# Altium PCB NC1-3A-BASIS.PcbDoc
Units mm, origin at the board's own origin, x right, y up, seen from the top; angles counter-clockwise.
Board outline 45 x 16 mm, 2 copper layers (Top Layer, Bottom Layer), stack 1.57 mm thick; 26 components, 18 nets, 68 pads, 38 vias.
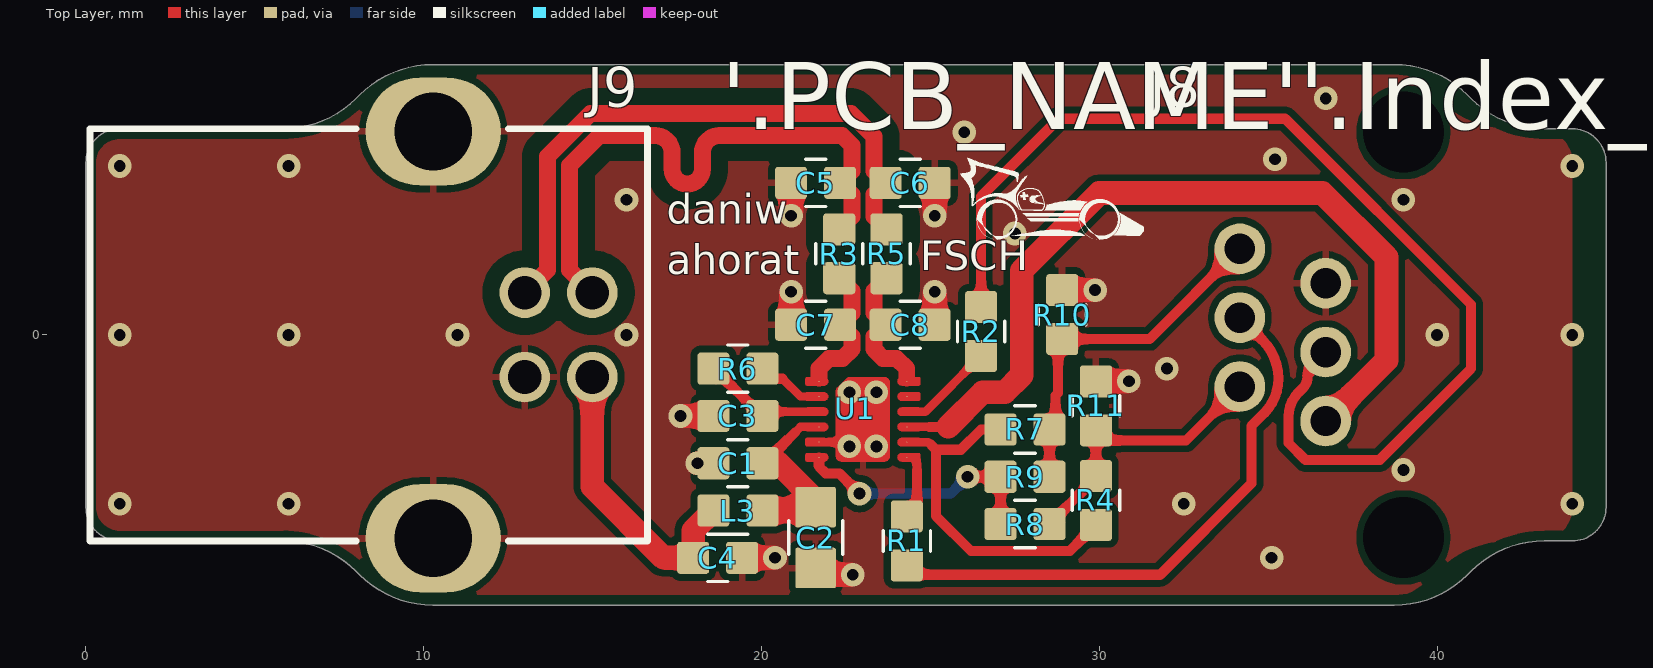
[diagram p0: Top Layer view]
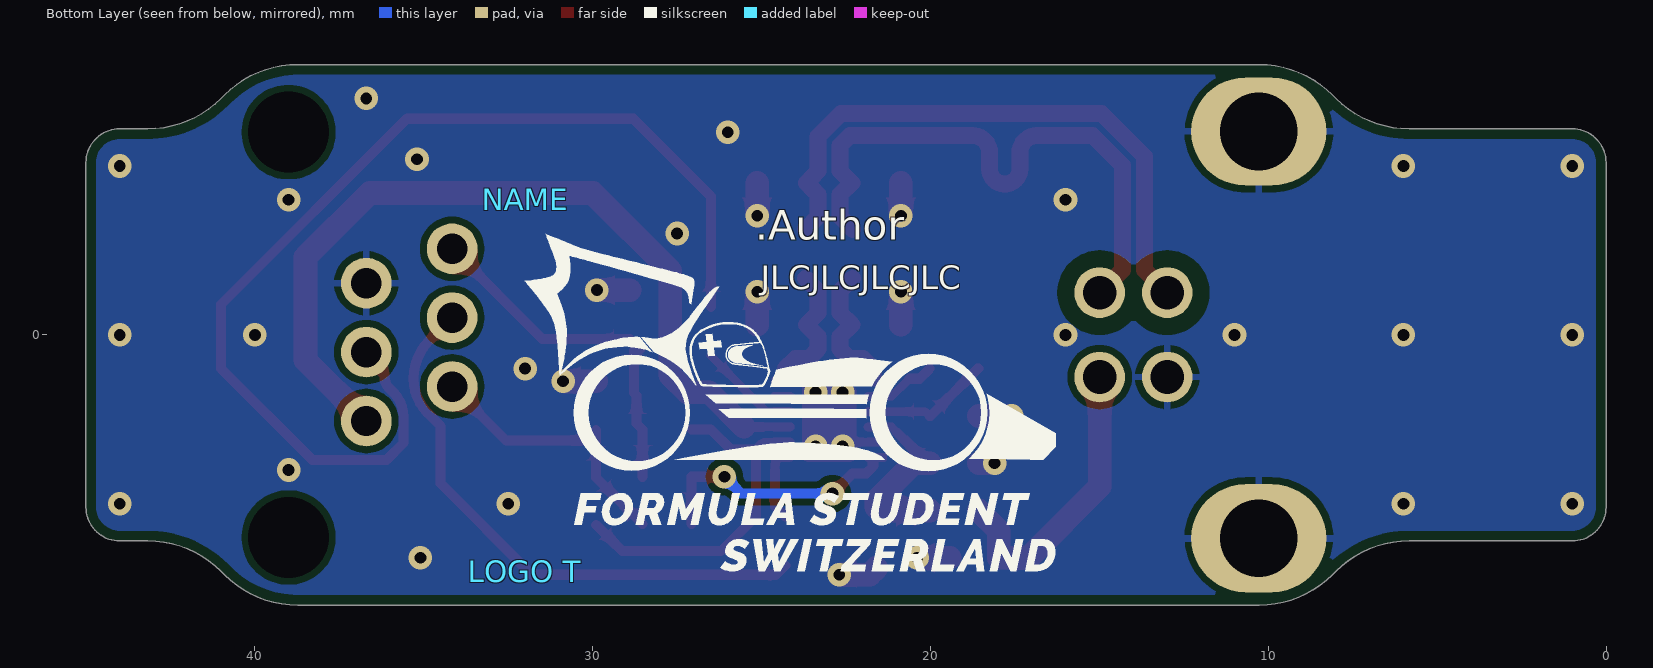
[diagram p1: Bottom Layer view, seen from below]

## Layer stack, top to bottom
Top Solder: solder mask 0.0102, Solder Resist, Dk 3.5
Top Layer: signal copper 0.035
Dielectric 1: dielectric 1.5, FR-4, Dk 4.8
Bottom Layer: signal copper 0.035
Bottom Solder: solder mask 0.0102, Solder Resist, Dk 3.5

## Board outline
1,-6.1 5.83,-6.1 cw(c5.83,-9.166) 7.998,-6.998 8.102,-7.102 ccw(c10.27,-4.934) 10.27,-8 38.73,-8 ccw(c38.73,-4.934) 40.898,-7.102 41.002,-6.998 cw(c43.17,-9.166) 43.17,-6.1 44,-6.1 ccw(c44,-5.1) 45,-5.1 45,5.1 ccw(c44,5.1) 44,6.1 43.17,6.1 cw(c43.17,9.166) 41.002,6.998 40.898,7.102 ccw(c38.73,4.934) 38.73,8 10.27,8 ccw(c10.27,4.934) 8.102,7.102 7.998,6.998 cw(c5.83,9.166) 5.83,6.1 1,6.1 ccw(c1,5.1) 0,5.1 0,-5.1 ccw(c1,-5.1)

## Design rules (kind name [scope] priority, off if disabled: settings)
BoardOutlineClearance [not (InComponent('MOUSE*'))] p1: gap=0.3 ignorepadtopadclearanceinfootprint=FALSE except(0: Arc-SplitContinuation Track-SplitContinuation SMDPad-SplitContinuation THPad-SplitContinuation Via-SplitContinuation Fill-SplitContinuation Poly-SplitContinuation Region-SplitContinuation Text-SplitContinuation)
Clearance Clearance_USB [InDifferentialPairClass('USB') vs not InDifferentialPairClass('USB')] p1: gap=0.5 ignorepadtopadclearanceinfootprint=FALSE except(0.15: Arc-Arc Arc-Track Arc-SMDPad Track-Track Track-SMDPad SMDPad-SMDPad; 0.2: Arc-THPad Arc-Via Arc-Text Arc-Hole Track-THPad Track-Via Track-Text Track-Hole SMDPad-THPad SMDPad-Via SMDPad-Text SMDPad-Hole THPad-THPad THPad-Via THPad-Text THPad-Hole Via-Via Via-Text Via-Hole Text-Text Text-Hole)
Clearance [All] p2: gap=0.2 ignorepadtopadclearanceinfootprint=FALSE except(0: Arc-Hole Track-Hole SMDPad-Hole THPad-Hole Via-Hole Fill-Hole Poly-Hole Region-Hole Text-Hole; 0.15: Arc-Arc Arc-Track Arc-SMDPad Arc-THPad Arc-Via Arc-Text Track-Track Track-SMDPad Track-THPad Track-Via Track-Text SMDPad-SMDPad SMDPad-THPad SMDPad-Via SMDPad-Text THPad-THPad THPad-Via THPad-Text Via-Via Via-Text Text-Text)
ComponentClearance ComponentClearance_ESP-01S [All] p1: gap=0.254 collisioncheckmode=3 verticalgap=0.254 showdistances=FALSE
ComponentClearance ComponentClearance_Enclosure [isfree] p2: gap=0 collisioncheckmode=3 verticalgap=0 showdistances=FALSE
ComponentClearance [All] p3: gap=0.25 collisioncheckmode=3 verticalgap=0.25 showdistances=FALSE
DiffPairsRouting [InDifferentialPair('D') or InDifferentialPair('USB_D')] p1: maxlimit=0.15 minlimit=0.15 mostfreqgap=0.15 toplayer_minwidth=0.5 toplayer_maxwidth=0.5 toplayer_prefwidth=0.5 bottomlayer_minwidth=0.5 bottomlayer_maxwidth=0.5 bottomlayer_prefwidth=0.5 impedanceprofiledriven=TRUE impedanceprofileid={0B2F72EE-70D5-4F8D-B648-94B946845256} impedanceprofilevalue=90.000000 maxuncoupledlength=12.7
Height [All] p1: minheight=0 maxheight=100 prefheight=12.7
HoleSize [All] p1: absolutevalues=TRUE maxlimit=27 minlimit=0.3 maxpercent=80.000 minpercent=20.000
HoleToHoleClearance [All] p1: gap=0.3 allowstackedmicrovias=TRUE
MatchedLengths "Schematic Matched Net Lengths_1" [InDifferentialPairClass('USB')] p1: tolerance=0.2 checknetsindiffpair=TRUE checkdiffpairvsdiffpair=FALSE checkxsignals=FALSE checkothers=FALSE
MinimumSolderMaskSliver [All] p1: minsoldermaskwidth=0.095
PolygonConnect [All] p1: thpad.connectstyle=Relief thpad.reliefconductorwidth=0.2 thpad.reliefentries=4 thpad.polygonreliefangle="90 Angle" thpad.airgapwidth=0.2 smdpad.connectstyle=Relief smdpad.reliefconductorwidth=0.2 smdpad.reliefentries=4 smdpad.polygonreliefangle="90 Angle" smdpad.airgapwidth=0.2 via.connectstyle=Direct via.reliefconductorwidth=0.254 via.reliefentries=4 via.polygonreliefangle="90 Angle" via.airgapwidth=0.254
RoutingVias [All] p1: holewidth=0.35 width=0.7 viastyle="Through Hole" minholewidth=0.35 minwidth=0.7 maxholewidth=5 maxwidth=6
SilkToSilkClearance [All] p1: silktosilkclearance=0.1
SilkToSolderMaskClearance [IsPad] p1: minsilkscreentomaskgap=0.1 clearancetoexposedcopper=TRUE
SolderMaskExpansion "SolderMaskExpansion Via" [IsVia] p1: expansion=0.1 istentingtop=TRUE
SolderMaskExpansion [All] p2: expansion=0.05 istentingtop=FALSE
UnRoutedNet [All] p1: checkbadconnections=TRUE
Width [All] p1: maxlimit=5 minlimit=0.15 preferedwidth=0.3 minimp=50.000000 maximp=50.000000 favimp=50.000000
21 further rules are at their usual default settings.

## Classes and differential pairs
differential pair class USB: D USB_D
component class NC1-3-Top: C1 C2 C3 C4 C5 C6 C7 C8 J8 J9 L3 R1 R2 R3 R4 R5 R6 R7 R8 R9 U1
differential pair USB_D: +USB_D_P -USB_D_N
differential pair D: +D_P -D_N

## Components (designator, comment, footprint, x,y, rotation, side; value= is the part's Value field where it differs from the comment)
C1 "100N/0603/50V/X7R" CAP0603_X7R 19.3,-3.8 r180 top value=100nF
C2 "4.7U/0805/16V/X7R" CAP0805_X7R 21.6,-6 r270 top value=4.7uF
C3 "100N/0603/50V/X7R" CAP0603_X7R 19.3,-2.4 r180 top value=100nF
C4 "10N/0603/50V/X7R" CAP0603_X7R 18.7,-6.6 r0 top value=10nF
C5 "10P/0603/50V/C0G" CAP0603_C0G 21.6,4.5 r180 top value=10pF
C6 "10P/0603/50V/C0G" CAP0603_C0G 24.4,4.5 r0 top value=10pF
C7 "10P/0603/50V/C0G" CAP0603_C0G 21.6,0.3 r180 top value=10pF
C8 "10P/0603/50V/C0G" CAP0603_C0G 24.4,0.3 r0 top value=10pF
J8 "RJ12" RJ12-PULSE-E5566-Q0LK22-L 45,0 r90 top
J9 "USB-B-CUI" USB-B_CUI_UJ2-BH-TH 0,0 r270 top
L3 "30R/0603/FERRITE" FB0603 19.3,-5.2 r0 top value=30R
"LOGO T" "Comment" FSCH-LOGO-10MM 32,-7 r180 bottom
NAME "Comment" PCB-NAME 32,4 r180 bottom
R1 "0R/0603" R0603-0.40-WW 24.3,-6.1 r270 top value=0R
R2 "0R/0603" R0603-0.40-WW 26.5,0.1 r90 top value=0R
R3 "27R/0603" R0603-0.40-WW 22.3,2.4 r270 top value=27R
R4 "0R/0603" R0603-0.40-WW 29.9,-4.9 r90 top value=0R
R5 "27R/0603" R0603-0.40-WW 23.7,2.4 r270 top value=27R
R6 "0R/0603" R0603-0.40-WW 19.3,-1 r0 top value=0R
R7 "0R/0603" R0603-0.40-WW 27.8,-2.8 r0 top value=0R
R8 "0R/0603" R0603-0.40-WW 27.8,-5.6 r0 top value=0R
R9 "0R/0603" R0603-0.40-WW 27.8,-4.2 r0 top value=0R
R10 "0R/0603" R0603-0.40-WW 28.9,0.6 r270 top value=0R
R11 "0R/0603" R0603-0.40-WW 29.9,-2.1 r270 top value=0R
U1 "FT234XD" DFN045P300X300X080-12-EP160X250 23,-2.5 r0 top
? "Comment" JLC-ORDER 21,3 r180 bottom

## Footprints (in the part's own frame and the unit in brackets; to place one, negate y for a bottom-side part, rotate by r counter-clockwise, add the part's x,y. Pads: shape width x height; smd on the part's side, far side on the other; paste and mask are expansions set on the pad)
CAP0603_C0G [mm]
  rrect20% 0.95x0.95 smd: 1(-0.725,0) 2(0.725,0)
  silkscreen extent -0.3,-0.7 0.3,0.7, body extent -0.8,-0.41 0.8,0.41, height 0.57
CAP0603_X7R [mm]
  rrect20% 0.95x0.95 smd: 1(-0.725,0) 2(0.725,0)
  silkscreen extent -0.3,-0.7 0.3,0.7, body extent -0.8,-0.41 0.8,0.41, height 0.57
CAP0805_X7R [mm] "Chip Capacitor 0805mil / 2012mm"
  rrect10% 1.2x1.2 smd: 1(-0.9,0) 2(0.9,0)
  silkscreen extent -0.5,-0.8 0.5,0.8, body extent -1,-0.51 1,0.51, height 0.72
DFN045P300X300X080-12-EP160X250 [mm]
  round 0.4 on Top Overlay: 1(-1.75,1.75)
  round 0.025 smd: 1(-1.3,1.125) 2(-1.3,0.675) 3(-1.3,0.225) 4(-1.3,-0.225) 5(-1.3,-0.675) 6(-1.3,-1.125) 7(1.3,-1.125) 8(1.3,-0.675) 9(1.3,-0.225) 10(1.3,0.225) 11(1.3,0.675) 12(1.3,1.125) EP(0,0)
  Top Layer region: 1.7,-1.05 1.7,-1.199 1.696,-1.218 1.685,-1.235 1.668,-1.246 1.649,-1.25 1.649,-1.25 1.15,-1.25 1.102,-1.24 1.061,-1.213 1.034,-1.172 1.024,-1.124 1.024,-1.124 1.034,-1.076 1.061,-1.035 1.102,-1.008 1.15,-0.999 1.15,-0.999 1.649,-0.999 1.668,-1.003 1.685,-1.014 1.696,-1.03 1.7,-1.05
  Top Layer region: 1.7,-0.6 1.7,-0.749 1.696,-0.768 1.685,-0.785 1.668,-0.796 1.649,-0.8 1.649,-0.8 1.15,-0.8 1.102,-0.79 1.061,-0.763 1.034,-0.722 1.024,-0.674 1.024,-0.674 1.034,-0.626 1.061,-0.585 1.102,-0.558 1.15,-0.549 1.15,-0.549 1.649,-0.549 1.668,-0.553 1.685,-0.564 1.696,-0.58 1.7,-0.6
  Top Layer region: 1.7,-0.15 1.7,-0.299 1.696,-0.318 1.685,-0.335 1.668,-0.346 1.649,-0.35 1.649,-0.35 1.15,-0.35 1.102,-0.34 1.061,-0.313 1.034,-0.272 1.024,-0.224 1.024,-0.224 1.034,-0.176 1.061,-0.135 1.102,-0.108 1.15,-0.099 1.15,-0.099 1.649,-0.099 1.668,-0.103 1.685,-0.114 1.696,-0.13 1.7,-0.15
  Top Layer region: 1.7,0.3 1.7,0.151 1.696,0.132 1.685,0.115 1.668,0.104 1.649,0.1 1.649,0.1 1.15,0.1 1.102,0.11 1.061,0.137 1.034,0.178 1.024,0.226 1.024,0.226 1.034,0.274 1.061,0.315 1.102,0.342 1.15,0.351 1.15,0.351 1.649,0.351 1.668,0.347 1.685,0.336 1.696,0.32 1.7,0.3
  Top Layer region: 1.7,0.75 1.7,0.601 1.696,0.582 1.685,0.565 1.668,0.554 1.649,0.55 1.649,0.55 1.15,0.55 1.102,0.56 1.061,0.587 1.034,0.628 1.024,0.676 1.024,0.676 1.034,0.724 1.061,0.765 1.102,0.792 1.15,0.801 1.15,0.801 1.649,0.801 1.668,0.797 1.685,0.786 1.696,0.77 1.7,0.75
  Top Layer region: 1.7,1.2 1.7,1.051 1.696,1.032 1.685,1.015 1.668,1.004 1.649,1 1.649,1 1.15,1 1.102,1.01 1.061,1.037 1.034,1.078 1.024,1.126 1.024,1.126 1.034,1.174 1.061,1.215 1.102,1.242 1.15,1.251 1.15,1.251 1.649,1.251 1.668,1.247 1.685,1.236 1.696,1.22 1.7,1.2
  Top Layer region: -1.7,-1.2 -1.7,-1.051 -1.696,-1.032 -1.685,-1.015 -1.668,-1.004 -1.649,-1 -1.649,-1 -1.15,-1 -1.102,-1.01 -1.061,-1.037 -1.034,-1.078 -1.024,-1.126 -1.024,-1.126 -1.034,-1.174 -1.061,-1.215 -1.102,-1.242 -1.15,-1.251 -1.15,-1.251 -1.649,-1.251 -1.668,-1.247 -1.685,-1.236 -1.696,-1.22 -1.7,-1.2
  Top Layer region: -1.7,-0.75 -1.7,-0.601 -1.696,-0.582 -1.685,-0.565 -1.668,-0.554 -1.649,-0.55 -1.649,-0.55 -1.15,-0.55 -1.102,-0.56 -1.061,-0.587 -1.034,-0.628 -1.024,-0.676 -1.024,-0.676 -1.034,-0.724 -1.061,-0.765 -1.102,-0.792 -1.15,-0.801 -1.15,-0.801 -1.649,-0.801 -1.668,-0.797 -1.685,-0.786 -1.696,-0.77 -1.7,-0.75
  Top Layer region: -1.7,-0.3 -1.7,-0.151 -1.696,-0.132 -1.685,-0.115 -1.668,-0.104 -1.649,-0.1 -1.649,-0.1 -1.15,-0.1 -1.102,-0.11 -1.061,-0.137 -1.034,-0.178 -1.024,-0.226 -1.024,-0.226 -1.034,-0.274 -1.061,-0.315 -1.102,-0.342 -1.15,-0.351 -1.15,-0.351 -1.649,-0.351 -1.668,-0.347 -1.685,-0.336 -1.696,-0.32 -1.7,-0.3
  Top Layer region: -1.7,0.15 -1.7,0.299 -1.696,0.318 -1.685,0.335 -1.668,0.346 -1.649,0.35 -1.649,0.35 -1.15,0.35 -1.102,0.34 -1.061,0.313 -1.034,0.272 -1.024,0.224 -1.024,0.224 -1.034,0.176 -1.061,0.135 -1.102,0.108 -1.15,0.099 -1.15,0.099 -1.649,0.099 -1.668,0.103 -1.685,0.114 -1.696,0.13 -1.7,0.15
  Top Layer region: -1.7,1.05 -1.7,1.199 -1.696,1.218 -1.685,1.235 -1.668,1.246 -1.649,1.25 -1.649,1.25 -1.15,1.25 -1.102,1.24 -1.061,1.213 -1.034,1.172 -1.024,1.124 -1.024,1.124 -1.034,1.076 -1.061,1.035 -1.102,1.008 -1.15,0.999 -1.15,0.999 -1.649,0.999 -1.668,1.003 -1.685,1.014 -1.696,1.03 -1.7,1.05
  Top Layer region: -0.8,0 -0.8,-1.09 -0.788,-1.151 -0.753,-1.203 -0.701,-1.238 -0.64,-1.25 -0.64,-1.25 0.64,-1.25 0.701,-1.238 0.753,-1.203 0.788,-1.151 0.8,-1.09 0.8,-1.09 0.8,1.09 0.788,1.151 0.753,1.203 0.701,1.238 0.64,1.25 0.64,1.25 0,1.25 -0.379,1.25 -0.445,1.237 -0.5,1.2 -0.5,1.2 -0.75,0.95 -0.787,0.895 -0.8,0.829 -0.8,0.829 -0.8,0.5
  Top Layer region: -1.7,0.6 -1.7,0.749 -1.696,0.768 -1.685,0.785 -1.668,0.796 -1.649,0.8 -1.649,0.8 -1.15,0.8 -1.102,0.79 -1.061,0.763 -1.034,0.722 -1.024,0.674 -1.024,0.674 -1.034,0.626 -1.061,0.585 -1.102,0.558 -1.15,0.549 -1.15,0.549 -1.649,0.549 -1.668,0.553 -1.685,0.564 -1.696,0.58 -1.7,0.6
  body extent -1.51,-1.5 1.51,1.5, height 0.81
FB0603 [mm]
  rrect20% 0.95x0.95 smd: 1(-0.725,0) 2(0.725,0)
  silkscreen extent -0.3,-0.7 0.3,0.7, body extent -0.8,-0.4 0.8,0.4, height 1
FSCH-LOGO-10MM [mm]
  silkscreen extent 0,0 15.7,9.99, body extent 0,0 15.7,9.99, height 0.01
JLC-ORDER [mm] "Placement of JLCPCB order number"
PCB-NAME [mm]
R0603-0.40-WW [mm]
  rrect20% 0.95x0.95 smd: 1(-0.725,0) 2(0.725,0)
  silkscreen extent -0.3,-0.7 0.3,0.7, body extent -0.8,-0.4 0.8,0.4, height 0.3
RJ12-PULSE-E5566-Q0LK22-L [mm]
  round 1.5 hole 0.9: 1(2.55,10.84) 2(1.53,8.3) 3(0.51,10.84) 4(-0.51,8.3) 5(-1.53,10.84) 6(-2.55,8.3)
  round 0 hole 2.4 unplated: M(-6,6) M(6,6)
  body extent -7.1,0 7.1,13.5, height 14.5
USB-B_CUI_UJ2-BH-TH [mm]
  round 1.5 hole 1: 1(1.25,14.99) 2(-1.25,14.99) 3(-1.25,12.99) 4(1.25,12.99)
  oval 3.2x4 hole 2.3: M(-6.02,10.28) M(6.02,10.28)
  silkscreen extent -6.1,0.12 6.1,16.62, body extent -7.5,0.12 7.5,16.62, height 10.81

## Part data
C1 C3: "CAP SM 0603 100nF 50V X7R", Absolute Value=1E-7, JLC Type=Basic, Manufacturer=GENERIC, Manufacturer 1=YAGEO, Manufacturer Part Number 1=CC0603KPX7R9BB104, Manufacturer Part Number 2=CC0603MRX7R9BB104, Package=0603, Supplier Part Number 1=311-3567-1-ND, Eurocircuits GPN=GPC0603104, HelpURL=https://www.yageo.com/upload/media/product/app/datasheet/mlcc/upy-gphc_x7r_6_3v-to-250v.pdf, Manufacturer 2=YAGEO, Part Number=100N/0603/50V/X7R, Supplier 1=Digi-Key, Supplier 2=Digi-Key, Supplier 3=LCSC, Supplier Part Number 2=311-4110-1-ND, Supplier Part Number 3=C14663
C2: "CAP SM 0805 4.7uF 16V X7R", Absolute Value=4.7E-6, Manufacturer=GENERIC, Manufacturer 1=Murata, Manufacturer Part Number 1=GRM21BR71C475KE51L, Manufacturer Part Number 3=TCC0603X5R475M160CT, Package=0805, Supplier Part Number 1=490-14466-1-ND, Eurocircuits GPN=GPN0805475-16, HelpURL=https://search.murata.co.jp/Ceramy/image/img/A01X/G101/ENG/GRM21BR71C475KE51-01.pdf, Part Number=4.7U/0805/16V/X7R, Supplier 1=Digi-Key, Supplier 3=LCSC, Supplier Part Number 3=C7393897
C4: "CAP SM 0603 10nF 50V X7R", Absolute Value=1E-8, Manufacturer=GENERIC, Manufacturer 1=YAGEO, Manufacturer Part Number 1=CC0603KPX7R9BB103, Manufacturer Part Number 2=CC0603KRX7R9BB103, Package=0603, Supplier Part Number 1=311-1572-1-ND, Eurocircuits GPN=GPC0603103, HelpURL=https://www.yageo.com/upload/media/product/app/datasheet/mlcc/upy-gphc_x7r_6_3v-to-250v.pdf, Manufacturer 2=YAGEO, Manufacturer Part Number 3=CC0603KRX7R9BB103, Part Number=10N/0603/50V/X7R, Supplier 1=Digi-Key, Supplier 2=Digi-Key, Supplier 3=LCSC, Supplier Part Number 2=311-1085-1-ND, Supplier Part Number 3=C100042
C5 C6 C7 C8: "CAP SM 0603 10pF 50V C0G", Absolute Value=1E-11, Manufacturer=GENERIC, Manufacturer 1=YAGEO, Manufacturer Part Number 1=CC0603JRNPO9BN100, Manufacturer Part Number 2=CC0603KRNPO9BN100, Package=0603, Supplier Part Number 1=311-1058-1-ND, Eurocircuits GPN=GPC0603100-C0G, HelpURL=https://www.yageo.com/upload/media/product/productsearch/datasheet/mlcc/UPY-GP_NP0_16V-to-50V_18.pdf, Manufacturer 2=YAGEO, Part Number=10P/0603/50V/C0G, Supplier 1=Digi-Key, Supplier 2=Digi-Key, Supplier Part Number 2=311-4025-1-ND
J8: library part RJ12-PULSE-E5566-Q0LK22-L, "RJ12 Pulse E5566-Q0LK22-L", Manufacturer=Pulse, Manufacturer 1="Pulse Electronics", Manufacturer Part Number 1=E5566-Q0LK22-L, Supplier Part Number 1=553-2258-ND, HelpURL=https://productfinder.pulseelectronics.com/api/open/part-attachments/datasheet/E5566-Q0LK22-L, Part Number=RJ12-PULSE-E5566-Q0LK22-L, Supplier 1=Digi-Key
J9: "USB-B CUI UJ2-BH-TH", Manufacturer=CUI, Manufacturer 1="CUI Devices", Manufacturer Part Number 1=UJ2-BH-1-TH, Supplier Part Number 1=102-3999-ND, HelpURL=https://www.cuidevices.com/product/resource/uj2-bh-th.pdf, Part Number=USB-B-CUI, Supplier 1=Digi-Key
L3: "30R@100MHz 5A 0603 Ferrite", Absolute Value=1000, Manufacturer=GENERIC, Manufacturer 1="Laird-Signal Integrity Products", Manufacturer Part Number 1=HI0603R300R-10, Package=603, Supplier Part Number 1=240-HI0603R300R-10CT-ND, HelpURL=https://www.laird.com/document/datasheet/hi0603r300r-10-datasheet, Part Number=30R/0603/FERRITE, Supplier 1=Digi-Key
R1 R2 R4 R6 R7 R8 R9 R10 R11: "RES SM 0603 0R", Absolute Value=0, JLC Type=Basic, Manufacturer=GENERIC, Manufacturer 1=YAGEO, Manufacturer 3="UNI-ROYAL(Uniroyal Elec)", Manufacturer Part Number 1=RC0603FR-070RL, Manufacturer Part Number 2=RC0603FR-130RL, Manufacturer Part Number 3=0603WAF0000T5E, Package=0603, Supplier Part Number 1=311-0.0HRCT-ND, Eurocircuits GPN=GPR06030R, HelpURL=https://www.yageo.com/upload/media/product/app/datasheet/rchip/pyu-rc_group_51_rohs_l.pdf, Manufacturer 2=YAGEO, Part Number=0R/0603, Supplier 1=Digi-Key, Supplier 2=Digi-Key, Supplier 3=LCSC, Supplier Part Number 2=13-RC0603FR-130RLCT-ND, Supplier Part Number 3=C21189
R3 R5: "RES SM 0603 27R", Absolute Value=27, Manufacturer=GENERIC, Manufacturer 1=YAGEO, Manufacturer Part Number 1=RC0603FR-1327RL, Manufacturer Part Number 2=RC0603FR-0727RL, Package=0603, Supplier Part Number 1=13-RC0603FR-1327RLCT-ND, Eurocircuits GPN=GPR060327R, HelpURL=https://www.yageo.com/upload/media/product/productsearch/datasheet/rchip/PYu-RC_Group_51_RoHS_L_12.pdf, Manufacturer 2=YAGEO, Part Number=27R/0603, Supplier 1=Digi-Key, Supplier 2=Digi-Key, Supplier Part Number 2=311-27.0HRCT-ND
U1: "FT234XD USB TO BASIC UART IC", Manufacturer=FTDI, Manufacturer 1="FTDI, Future Technology Devices International Ltd", Manufacturer Part Number 1=FT234XD-R, Manufacturer Part Number 2=FT234XD-T, Package=DFN-12, Supplier Part Number 1=768-1178-1-ND, HelpURL=https://www.ftdichip.com/Support/Documents/DataSheets/ICs/DS_FT234XD.pdf, Manufacturer 2="FTDI, Future Technology Devices International Ltd", Part Number=FT234XD, Supplier 1=Digi-Key, Supplier 2=Digi-Key, Supplier Part Number 2=768-1345-ND

## Via types
v1: diameter 0.7, hole 0.35, Top Layer to Bottom Layer, tented both sides, 38 vias

## Nets (pads, with @x,y where several pads share a name; then routed paths per layer and width w, separated by ;. In a path a pad name is that pad's centre, name@x,y a point inside that pad or via, vN(x,y) a via of type N, cw(c..) or ccw(c..) an arc to the next point about the centre after c; other vN are vias at no path point)
+3V3: J8.6 U1.9 | length 25.3
  Top Layer w0.25: U1.9 24.975,-2.725
  Top Layer w0.3: 24.975,-2.725 25.525,-2.725
  Top Layer w0.7: 25.525,-2.725 26.55,-1.7 27.2,-1.7 27.7,-1.2 27.7,1.9 30,4.2 36.6,4.2 38.5,2.3 38.5,-0.75 J8.6
+3V3_USB: C3.1 R6.1 U1.3 | length 3.8
  Top Layer w0.25: C3.1 20.15,-2.275 U1.3
  Top Layer w0.3: R6.1 18.6,-1 20,-2.4 C3.1
D_N: C7.1 R3.2 U1.1@21.7,-1.375 | length 4
  Top Layer w0.5: 21.7,-1.275 21.7,-1 22,-0.7 22.4,-0.7 22.675,-0.425 22.675,-0.05 C7.1 22.675,0.65 22.675,1.3 R3.2
D_P: C8.1 R5.2 U1.12 | length 4
  Top Layer w0.5: R5.2 23.325,1.3 23.325,0.65 C8.1 23.325,-0.05 23.325,-0.425 23.6,-0.7 24,-0.7 24.3,-1 24.3,-1.275
GND: C1.2 C2.2 C3.2 C4.2 C5.2 C6.2 C7.2 C8.2 J8.2 J9.4 J9.M R10.1 R11.1 U1.5 U1.EP | length 10.4
  Top Layer w0.25: U1.5 22.475,-3.175 v1(22.6,-3.3)
  Top Layer w0.7: v1(17.6,-2.4) C3.2 ; v1(18.1,-3.8) C1.2 ; C4.2 v1(20.4,-6.6) ; C7.2 v1(20.875,1.275) ; v1(20.875,3.525) C5.2 ; C2.2 21.8,-7.1 v1(22.7,-7.1) ; C8.2 v1(25.125,1.275) ; v1(25.125,3.525) C6.2 ; R10.1 v1(29.875,1.325) ; R11.1 v1(30.875,-1.375)
  other v1: 35.1,-6.6 1,-5 6,-5 32.5,-5 44,-5 39,-4 23.4,-3.3 22.6,-1.7 23.4,-1.7 32,-1 1,0 6,0 11,0 16,0 40,0 44,0 27.5,3 16,4 39,4 1,5 6,5 44,5 35.2,5.2 26,6 36.7,7
GPIO0: J8.5 R4.2 R8.2 R11.2 | length 8.3
  Top Layer w0.3: R8.2 29.9,-4.225 R4.2 29.9,-3.138 R11.2@29.913,-3.125 ; R11.2 29.9,-3.125 32.565,-3.125 J8.5
NetR1_1: R1.1 U1.7 | length 2.1
  Top Layer w0.25: U1.7 24.525,-3.625 24.6,-3.7 24.6,-4
  Top Layer w0.3: R1.1 24.6,-5.075 24.6,-4
NetR2_1: R2.1 U1.10 | length 2.9
  Top Layer w0.25: U1.10 24.85,-2.275 R2.1
NetR4_1: R4.1 R7.1 U1.8 | length 10.6
  Top Layer w0.25: U1.8 24.941,-3.175 25.016,-3.25
  Top Layer w0.3: 25.016,-3.25 25.166,-3.4 ; R7.1 26.5,-2.8 25.9,-3.4 25.166,-3.4 ; R4.1 29.125,-6.4 26.2,-6.4 25.166,-5.366 25.166,-3.4
NetR6_2: R6.2 U1.2 | length 2
  Top Layer w0.25: 20.625,-1.3 21.15,-1.825 U1.2
  Top Layer w0.3: R6.2 20.325,-1.3 20.625,-1.3
NetR8_1: R8.1 R9.1 U1.6 | length 7.6
  Top Layer w0.3: U1.6 21.7,-3.9 21.9,-4.1 22.3,-4.1 v1(22.9,-4.7) ; v1(26.1,-4.2) R9.1 R8.1
  Bottom Layer w0.3: v1(22.9,-4.7) 25.6,-4.7 v1(26.1,-4.2)
RST: J8.1 R7.2 R9.2 R10.2 | length 10.8
  Top Layer w0.3: R9.2 R7.2 28.7,-2.625 28.7,-1.8 28.777,-1.723 28.777,-0.45 28.752,-0.425 28.6,-0.425 28.676,-0.349 R10.2 31.485,-0.125 J8.1
RXD: J8.3 R1.2 | length 17
  Top Layer w0.3: R1.2 24.575,-7.1 31.8,-7.1 34.5,-4.4 34.5,-2.7 34.871,-2.329 ccw(c33.834,-1.293) 35.3,-1.293 ccw(c33.7,-1.293) 34.831,-0.161 J8.3
TXD: J8.4 R2.2 | length 32.7
  Top Layer w0.3: R2.2 26.5,4.1 28.8,6.4 35.5,6.4 41,0.9 41,-1 38.3,-3.7 36.1,-3.7 35.6,-3.2 35.6,-2.424 cw(c36.624,-2.424) 35.9,-1.7 36.024,-1.576 ccw(c35.691,-1.243) 36.162,-1.243 cw(c36.633,-1.243) 36.3,-0.91 J8.4
USB_D_N: C5.1 J9.2 R3.1 | length 17.9
  Top Layer w0.5: J9.2 14.315,1.925 14.315,5.015 15.2,5.9 15.7,5.9 16.85,5.9 cw(c16.85,5.4) 17.35,5.4 17.35,4.915 ccw(c17.8,4.915) 18.25,4.915 18.25,5.4 cw(c18.75,5.4) 18.75,5.9 19.701,5.9 22.381,5.9 22.675,5.606 22.675,4.85 C5.1 22.675,4.15 22.675,3.5 R3.1
USB_D_P: C6.1 J9.3 R5.1 | length 18
  Top Layer w0.5: J9.3 13.665,1.925 13.665,5.284 14.931,6.55 22.65,6.55 23.325,5.875 23.325,4.85 23.5,4.675 C6.1 23.5,4.325 23.325,4.15 23.325,3.5 R5.1
USB_VBUS: C4.1 J9.1 L3.1 | length 8.7
  Top Layer w0.7: J9.1 14.99,-4.49 17.1,-6.6 C4.1 17.975,-5.8 L3.1
VBUS: C1.1 C2.1 L3.2 U1.4 | length 5.9
  Top Layer w0.25: 20.987,-2.887 21.15,-2.725 U1.4
  Top Layer w0.3: C1.1@20.075,-3.8 20.987,-2.887
  Top Layer w0.7: L3.2 21.5,-5.2 C2.1 21.6,-4.9 20.5,-3.8 20.075,-3.8 C1.1
pads on no net: J8.M U1.1@21.25,-0.75 U1.11

## Polygon pours and split planes (outlines as drawn)
GND on Bottom Layer "GND_L02_P003" (solid, remove dead copper, pour order 3): 1,-6.1 5.83,-6.1 cw(c5.83,-9.166) 7.998,-6.998 8.102,-7.102 ccw(c10.27,-4.934) 10.27,-8 37.73,-8 ccw(c37.73,-4.934) 39.898,-7.102 40.002,-6.998 cw(c42.17,-9.166) 42.17,-6.1 43,-6.1 ccw(c43,-5.1) 44,-5.1 44,5.1 ccw(c43,5.1) 43,6.1 42.17,6.1 cw(c42.17,9.166) 40.002,6.998 39.898,7.102 ccw(c37.73,4.934) 37.73,8 10.27,8 ccw(c10.27,4.934) 8.102,7.102 7.998,6.998 cw(c5.83,9.166) 5.83,6.1 1,6.1 ccw(c1,5.1) 0,5.1 0,-5.1 ccw(c1,-5.1)
GND on Bottom Layer "GND_L02_P000" (solid, remove dead copper, pour order 0): -49.5,-48 ccw(c-48,-48) -48,-49.5 48,-49.5 ccw(c48,-48) 49.5,-48 49.5,48 ccw(c48,48) 48,49.5 -48,49.5 ccw(c-48,48) -49.5,48
GND on Top Layer "GND_L01_P002" (solid, remove dead copper, pour order 2): 1,-6.1 5.83,-6.1 cw(c5.83,-9.166) 7.998,-6.998 8.102,-7.102 ccw(c10.27,-4.934) 10.27,-8 37.73,-8 ccw(c37.73,-4.934) 39.898,-7.102 40.002,-6.998 cw(c42.17,-9.166) 42.17,-6.1 43,-6.1 ccw(c43,-5.1) 44,-5.1 44,5.1 ccw(c43,5.1) 43,6.1 42.17,6.1 cw(c42.17,9.166) 40.002,6.998 39.898,7.102 ccw(c37.73,4.934) 37.73,8 10.27,8 ccw(c10.27,4.934) 8.102,7.102 7.998,6.998 cw(c5.83,9.166) 5.83,6.1 1,6.1 ccw(c1,5.1) 0,5.1 0,-5.1 ccw(c1,-5.1)

## Silkscreen, mask and mechanical layers (free items; w line width, h text height)
Top Overlay:
  drawing of 12 lines, arcs and shapes, not listed
  text "'.PCB_NAME''.Index_Main'" at 18.803,5.438 h3.4
  text "FSCH" at 24.7,1.617 h1.5
  text "daniw / ahorat" at 17.2,1.5 h1.5
Bottom Overlay:
  text ".Author" at 25.184,2.52 h1.5
Board:
  lines w0.2: 0,-5.1 ccw(c1,-5.1) 1,-6.1 5.83,-6.1 cw(c5.83,-9.166) 7.998,-6.998 8.102,-7.102 ccw(c10.27,-4.934) 10.27,-8 38.73,-8 ccw(c38.73,-4.934) 40.898,-7.102 41.002,-6.998 cw(c43.17,-9.166) 43.17,-6.1 44,-6.1 ccw(c44,-5.1) 45,-5.1 45,0 45,5.1 ccw(c44,5.1) 44,6.1 43.17,6.1 cw(c43.17,9.166) 41.002,6.998 40.898,7.102 ccw(c38.73,4.934) 38.73,8 10.27,8 ccw(c10.27,4.934) 8.102,7.102 7.998,6.998 cw(c5.83,9.166) 5.83,6.1 1,6.1 ccw(c1,5.1) 0,5.1 0,0 0,-5.1

## Text inside footprints (layer, text, board x,y; h text height)
?: Bottom Overlay "JLCJLCJLCJLC" at 25.019,1.116 h1.2